# EAGLE board Sensorenschakeling_PCB_v2.3 (EAGLE 9.7.0)
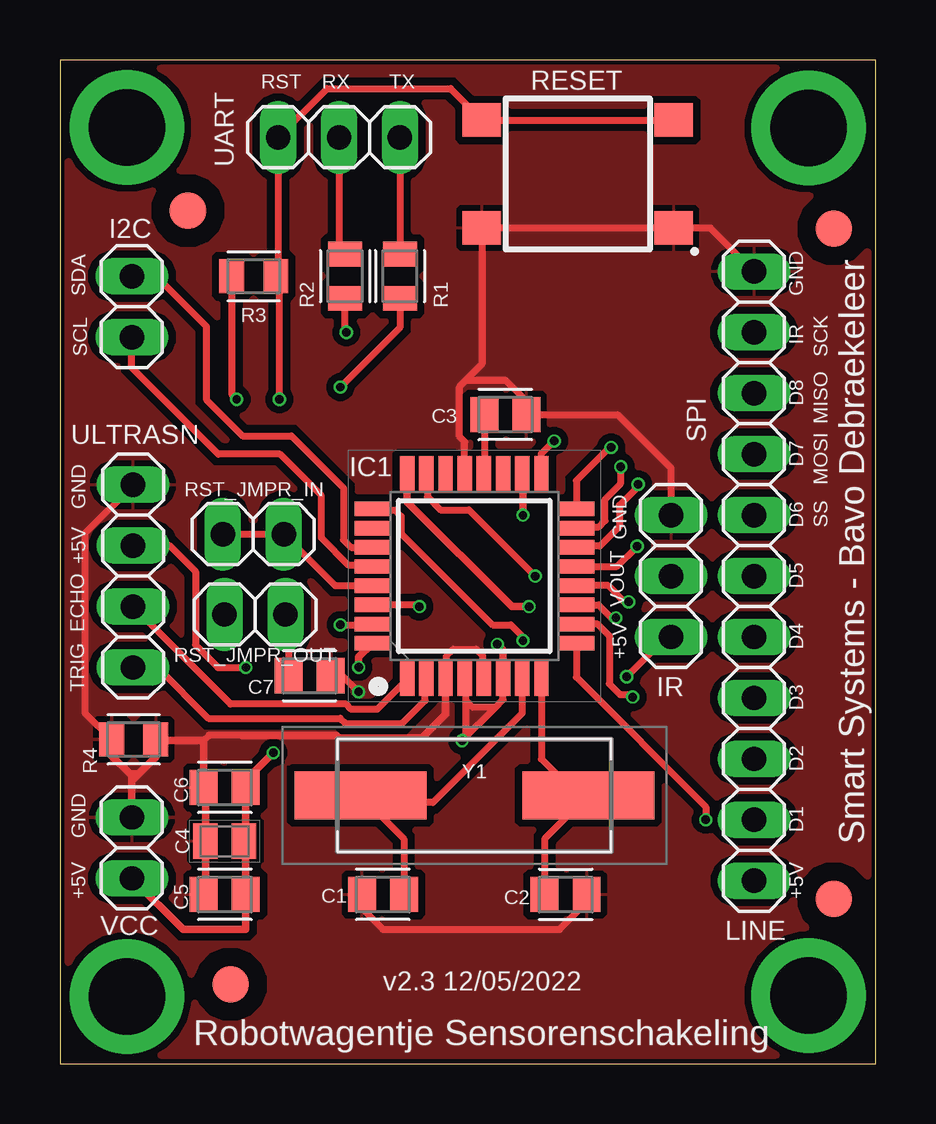
[diagram p0: board, top side]
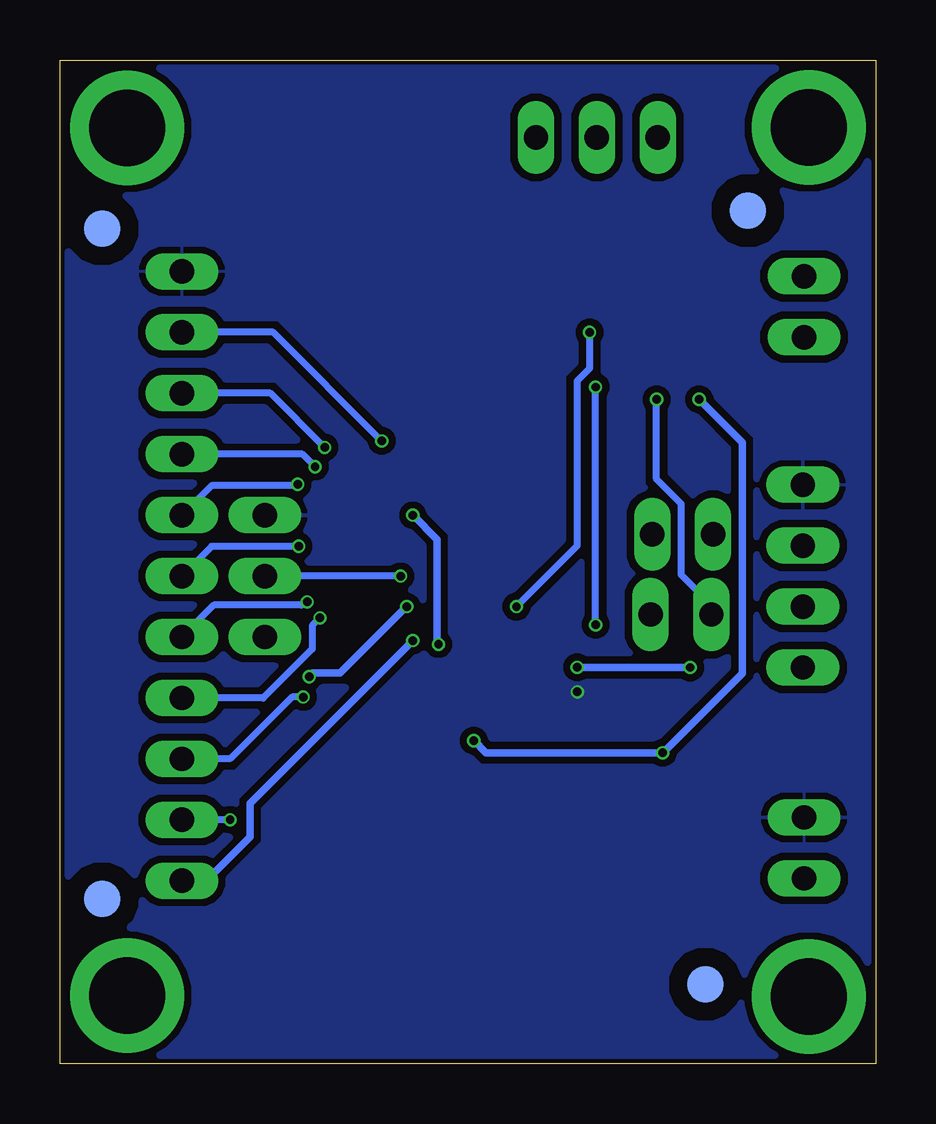
[diagram p1: board, bottom side, seen from below]

Size 34.02 x 41.83 mm. Coordinates in mm from the lower left corner, seen from the top.
Outline: 0,0 34.02,0 34.02,41.83 0,41.83 0,0
Copper layers (1*16): Top 0.035mm / dielectric 1.5mm / Bottom 0.035mm
Design rules "default *": minimum track width 0.3mm, minimum drill 0.35mm, track to track 0.3mm, track to pad 0.3mm, pad to pad 0.2mm, via to via 0.3mm, smd to smd 0.2mm, copper to edge 0.2mm, drill to drill 0.3mm, minimum pad ring 0.1mm, minimum via ring 0.1mm, stop-mask expansion 4mil, vias tented up to drill 0mil, thermal gap 10mil

## Footprints (pad centres in the part's own frame; a part is rotated, then mirrored left to right if it is on the bottom)
CAPC2012X110 = smd 1.165 x 1.465: 1 -0.875,0; 2 0.875,0
CAPC2012X145N = smd 1.02 x 1.47: 1 -0.8,0; 2 0.8,0
FID_060_P = smd 1.524 x 1.524 bottom: FIDB 0,0 | smd 1.524 x 1.524: FIDT 0,0
1X02 = drill 1.016 long: 1 -1.27,0; 2 1.27,0
QFP80P900X900X120-32N = smd 1.5 x 0.6: 1 -4.25,2.8; 2 -4.25,2; 3 -4.25,1.2; 4 -4.25,0.4; 5 -4.25,-0.4; 6 -4.25,-1.2; 7 -4.25,-2; 8 -4.25,-2.8; 17 4.25,-2.8; 18 4.25,-2; 19 4.25,-1.2; 20 4.25,-0.4; 21 4.25,0.4; 22 4.25,1.2; 23 4.25,2; 24 4.25,2.8 | smd 0.6 x 1.5: 9 -2.8,-4.25; 10 -2,-4.25; 11 -1.2,-4.25; 12 -0.4,-4.25; 13 0.4,-4.25; 14 1.2,-4.25; 15 2,-4.25; 16 2.8,-4.25; 25 2.8,4.25; 26 2,4.25; 27 1.2,4.25; 28 0.4,4.25; 29 -0.4,4.25; 30 -1.2,4.25; 31 -2,4.25; 32 -2.8,4.25
1X03 = drill 1.016 long: 1 -2.54,0; 2 0,0; 3 2.54,0
1X11 = drill 1.016 long: 1 -12.7,0; 2 -10.16,0; 3 -7.62,0; 4 -5.08,0; 5 -2.54,0; 6 0,0; 7 2.54,0; 8 5.08,0; 9 7.62,0; 10 10.16,0; 11 12.7,0
BEAGLEBONEBLACK_MOUNTING_HOLE = drill 3.175 pad 4.445: P$1 0,0
RESC2012X65 = smd 1.031 x 1.42: 1 -0.919,0; 2 0.919,0
B3FS-1000P = smd 1.6 x 1.4: 1 4,-2.25; 2 -4,-2.25; 3 4,2.25; 4 -4,2.25
1X04 = drill 1.016 long: 1 -3.81,0; 2 -1.27,0; 3 1.27,0; 4 3.81,0
HC49SM830506016ATF = smd 5.5 x 2: 1 -4.75,0; 2 4.75,0

## Placement (x,y rotation side)
C1  22pF  [CAPC2012X110]  13.46,7.05 0 top
C2  22pF  [CAPC2012X110]  21.08,7.05 180 top
C3  100nF  [CAPC2012X110]  18.57,27.05 0 top
C4  4.7uF_16V  [CAPC2012X145N]  6.87,9.27 0 top
C5  1uF  [CAPC2012X110]  6.87,7.05 0 top
C6  1uF  [CAPC2012X110]  6.87,11.51 0 top
C7  10uF  [CAPC2012X110]  10.41,16.17 180 top
FD1  FID_60MIL_P  [FID_060_P]  7.11,3.3 0 top
FD2  FID_60MIL_P  [FID_060_P]  32.26,34.8 0 top
FD3  FID_60MIL_P  [FID_060_P]  5.33,35.56 0 top
FD4  FID_60MIL_P  [FID_060_P]  32.26,6.86 0 top
I2C  [1X02]  3,31.55 270 top
IC1  ATMEGA328P-AN  [QFP80P900X900X120-32N]  17.27,20.32 90 top
IR  PINHD-1X3  [1X03]  25.48,20.32 90 top
LINE  PINHD-1X11  [1X11]  28.93,20.32 270 top
MGT1  BEAGLEBONEBLACK_MOUNTING_HOLE  [BEAGLEBONEBLACK_MOUNTING_HOLE]  2.79,2.79 0 top
MGT2  BEAGLEBONEBLACK_MOUNTING_HOLE  [BEAGLEBONEBLACK_MOUNTING_HOLE]  31.21,2.84 0 top
MGT3  BEAGLEBONEBLACK_MOUNTING_HOLE  [BEAGLEBONEBLACK_MOUNTING_HOLE]  2.79,39.02 0 top
MGT4  BEAGLEBONEBLACK_MOUNTING_HOLE  [BEAGLEBONEBLACK_MOUNTING_HOLE]  31.21,39 0 top
R1  1kΩ  [RESC2012X65]  14.17,32.82 90 top
R2  1kΩ  [RESC2012X65]  11.89,32.82 90 top
R3  1kΩ  [RESC2012X65]  8.08,32.82 180 top
R4  1kΩ  [RESC2012X65]  3.07,13.51 0 top
RESET  B3FS-1000P  [B3FS-1000P]  21.59,37.08 0 top
RST_JMPR_IN  [1X02]  8.06,22.07 0 top
RST_JMPR_OUT  [1X02]  8.13,18.72 0 top
UART  [1X03]  11.63,38.61 0 top
ULTRASN  PINHD-1X4  [1X04]  3.05,20.32 90 top
VCC  [1X02]  3,8.99 90 top
Y1  16MHz  [HC49SM830506016ATF]  17.27,11.18 180 top

## Library data of the parts
C1-C3 C5-C7 = Capacitor; CATEGORY: Capacitor
C4 = CC0805ZKY5V7BB475; ARROW_PART_NUMBER: CC0805ZKY5V7BB475; ARROW_PRICE-STOCK: https://www.arrow.com/en/products/cc0805zky5v7bb475/yageo; DESCRIPTION: YAGEO - CC0805ZKY5V7BB475 - SMD Multilayer Ceramic Capacitor, 4.7 F, 16 V, 0805 [2012 Metric], +80%, -20%, Y5V, CC Series; HEIGHT: 1.45mm; MANUFACTURER_NAME: KEMET; MANUFACTURER_PART_NUMBER: CC0805ZKY5V7BB475; MOUSER_PART_NUMBER: 603-CC805ZKY5V7BB475; MOUSER_PRICE-STOCK: https://www.mouser.co.uk/ProductDetail/Yageo/CC0805ZKY5V7BB475?qs=7s%252B3O6pAiyA4wtTM471wUA%3D%3D
FD1-FD4 = Fiducial
I2C RST_JMPR_IN RST_JMPR_OUT UART VCC = pinhead
IC1 = ATMEGA328P-AN; ARROW_PART_NUMBER: ATMEGA328P-AN; ARROW_PRICE-STOCK: https://www.arrow.com/en/products/atmega328p-an/microchip-technology?region=nac; DESCRIPTION: MCU 8-bit ATmega AVR RISC 32KB Flash Atmel ATMEGA328P-AN, 8bit AVR Microcontroller, 20MHz, 32 kB Flash, 32-Pin TQFP; HEIGHT: 1.2mm; MANUFACTURER_NAME: Microchip; MANUFACTURER_PART_NUMBER: ATMEGA328P-AN; MOUSER_PART_NUMBER: 556-ATMEGA328P-AN; MOUSER_PRICE-STOCK: https://www.mouser.co.uk/ProductDetail/Microchip-Technology-Atmel/ATMEGA328P-AN?qs=6Dg1WZIWLC6WK556tw8xAw%3D%3D
IR LINE ULTRASN = Connector; CATEGORY: CONNECTOR; SUB-CATEGORY: PIN-HEADER
MGT1-MGT4 = BeagleBone_Black_Wireless
R1-R4 = Resistor; CATEGORY: Resistor; SUB-CATEGORY: Fixed
RESET = B3FS-1000P; ARROW_PART_NUMBER: B3FS-1000P; ARROW_PRICE-STOCK: https://www.arrow.com/en/products/b3fs-1000p/omron?region=nac; DESCRIPTION: Switch Tact,6x6mm,flat act,gen purp,tape Plunger Tactile Switch, SPST-NO 0.05 A@ 24 V dc 0.5mm; HEIGHT: mm; MANUFACTURER_NAME: Omron Electronics; MANUFACTURER_PART_NUMBER: B3FS-1000P; MOUSER_PART_NUMBER: 653-B3FS-1000P; MOUSER_PRICE-STOCK: https://www.mouser.co.uk/ProductDetail/Omron-Electronics/B3FS-1000P?qs=ImaqFqjHA4k6odVF2%2FXWpQ%3D%3D
Y1 = HC49SM-8-30-50-60-16-ATF; DESCRIPTION: MULTICOMP - HC49SM-8-30-50-60-16-ATF - CRYSTAL, 8MHZ, 16PF, SMD; HEIGHT: 4mm; MANUFACTURER_NAME: MULTICOMP; MANUFACTURER_PART_NUMBER: HC49SM-8-30-50-60-16-ATF

## Nets
AREF: C3.1 IC1.20
D1: IC1.9 LINE.10
D2: IC1.10 LINE.9
D3: IC1.11 LINE.8
D4: IC1.12 LINE.7
D5: IC1.13 LINE.6
D6: IC1.14 LINE.5
D7: IC1.15 LINE.4
D8: IC1.16 LINE.3
ECHO: IC1.1 ULTRASN.2
GND: C1.1 C2.1 C3.2 C4.1 C5.1 C6.1 C7.1 IC1.3 IC1.5 IC1.21 IR.3 LINE.1 R4.1 R4.2 RESET.1 RESET.2 ULTRASN.4 VCC.2
IR: IC1.17 LINE.2
IR_ON/OFF: IC1.24 IR.1
LINE_ON/OFF: IC1.25 LINE.11
N$1: IC1.31 R1.1
N$2: IC1.30 R2.1
RST: IC1.29 RST_JMPR_IN.1 RST_JMPR_IN.2
RST_C: C7.2 RST_JMPR_OUT.2
RST_USB: R3.1 RESET.3 RESET.4 RST_JMPR_OUT.1 UART.1
RX: R2.2 UART.2
SCL: I2C.2 IC1.28
SDA: I2C.1 IC1.27
TOSC1: C1.2 IC1.7 Y1.2
TOSC2: C2.2 IC1.8 Y1.1
TRIG: IC1.2 ULTRASN.1
TX: R1.2 UART.3
ULTRASN_ON/OFF: IC1.32 ULTRASN.3
VCC: C4.2 C5.2 C6.2 IC1.4 IC1.6 IC1.18 R3.2 VCC.1
VOUT: IC1.23 IR.2

## Tracks (layer width: path | path; a pad name or v marks a point on that pad's centre or on a via)
AREF
  Top 0.3: C3.1 17.69,24.59 IC1.20
D1  (via drill 0.35)
  Top 0.3: IC1.9 21.52,16.11 26.92,10.7 v26.92,10.16
  Bottom 0.3: v26.92,10.16 LINE.10
D2  (via drill 0.35 pad 0.55)
  Top 0.3: v23.88,15.28 23.77,15.38 23.35,15.38 22.9,15.83 22.9,17.83 22.46,18.27 22.41,18.32 IC1.10
  Bottom 0.3: LINE.9 26.92,12.7 24.34,15.28 v23.88,15.28
D3  (via drill 0.35 pad 0.55)
  Top 0.3: v23.18,18.58 23,18.58 22.46,19.12 IC1.11
  Bottom 0.3: v23.18,18.58 23.5,18.25 23.5,17.28 25.54,15.24 LINE.8
D4  (via drill 0.35 pad 0.55)
  Top 0.3: v23.71,19.25 23.53,19.25 22.86,19.92 IC1.12
  Bottom 0.3: v23.71,19.25 23.82,19.25 23.96,19.11 27.61,19.11 LINE.7
D5  (via drill 0.35 pad 0.55)
  Top 0.3: IC1.13 23.22,20.72 v24.07,21.56
  Bottom 0.3: v24.07,21.56 27.69,21.56 LINE.6
D6  (via drill 0.35 pad 0.55)
  Top 0.3: IC1.14 21.57,21.57 22.51,21.57 23.32,22.39 23.32,23.27 23.98,23.93 23.98,24.02 v24.11,24.14
  Bottom 0.3: LINE.5 27.7,24.09 24.16,24.09 v24.11,24.14
D7  (via drill 0.35 pad 0.55)
  Top 0.3: v23.38,24.88 23.38,24.18 22.72,23.52 22.72,22.63 22.46,22.37 21.57,22.37 IC1.15
  Bottom 0.3: v23.38,24.88 23.9,25.4 LINE.4
D8  (via drill 0.35 pad 0.55)
  Top 0.3: v22.98,25.68 22.91,25.68 21.52,24.29 IC1.16
  Bottom 0.3: v22.98,25.68 25.24,27.94 LINE.3
ECHO
  Top 0.3: IC1.1 14.47,16.02 13.22,14.77 12.15,14.77 11.93,14.99 7.11,14.99 ULTRASN.2
GND  (via drill 0.35)
  Top 0.3: 28.77,32.85 LINE.1 27.12,34.83 RESET.1 RESET.2 17.59,29.15 16.92,28.49 | IR.3 25.48,24.82 23.24,27.05 C3.2 19.44,27.62 18.58,28.49 16.92,28.49 | ULTRASN.4 3.05,24.11 1.04,22.1 1.04,14.62 R4.1 | 16.92,28.49 16.66,28.22 16.66,26.13 16.87,25.92 IC1.21 | C1.1 12.59,6.46 13.46,5.59 20.83,5.59 21.96,6.72 C2.1 | IC1.3 16.12,16.12 16.12,17.01 16.39,17.27 17.36,17.27 17.62,17.01 17.62,16.12 IC1.5 | C7.1 11.77,16.17 v12.45,15.49 | 7.58,13.68 6.21,13.68 5.99,13.46
  Top 0.305: 3.99,12.78 3.28,12.07 | 3.28,12.07 3,11.79 | VCC.2 3,11.79 | IC1.3 16.07,14.55 15.09,13.57 11.65,13.57 11.54,13.68 7.58,13.68 | 3.99,12.78 R4.2 4.04,13.46 5.99,13.46 C6.1 6.07,11.43 C4.1 6.07,7.12 C5.1 | 3.99,12.78 3.99,12.77 | 2.21,13.46 R4.1 2.15,12.83 2.92,12.07 | 3,11.79 3,11.99 2.92,12.07 | 2.92,12.07 3.28,12.07 | 17.62,16.12 IC1.5
  pour Top: -0.25,42.16 -0.25,-1.27 34.8,-1.27 34.8,42.16
  pour Bottom: -0.51,42.16 -0.51,-1.27 34.8,-1.27 34.8,42.16
IR  (via drill 0.35 pad 0.55)
  Top 0.3: IC1.17 20.07,25.42 v20.6,25.95
  Bottom 0.3: v20.6,25.95 25.13,30.48 LINE.2
IR_ON/OFF  (via drill 0.35 pad 0.55)
  Top 0.3: v23.63,16.13 25.28,17.78 IR.1
  Top 0.305: IC1.24 14.47,23.41 18.84,19.05 v19.56,19.05
  Bottom 0.305: v23.63,16.13 23.48,16.27 22.34,16.27 v19.56,19.05
LINE_ON/OFF  (via drill 0.35 pad 0.55)
  Top 0.3: IC1.25 13.07,23.07 13.96,23.07 14.22,22.81 14.22,22.1 18.03,18.29 18.8,18.29 19.3,17.78 v19.3,17.63
  Bottom 0.305: LINE.11 27.92,7.62 26.09,9.45 26.09,10.85 v19.3,17.63
N$1  (via drill 0.35, 0.35 pad 0.55)
  Top 0.3: R1.1 14.17,30.68 v11.69,28.2 | IC1.31 12.99,18.29 v11.68,18.29
  Bottom 0.3: v11.68,18.29 v11.68,28.19 v11.69,28.2
N$2  (via drill 0.35, 0.35 pad 0.55)
  Top 0.3: v11.94,30.48 11.89,30.53 R2.1 | v14.99,19.05 14.92,19.12 IC1.30
  Bottom 0.3: v14.99,19.05 12.45,21.58 12.45,28.46 11.94,28.98 v11.94,30.48
RST
  Top 0.3: RST_JMPR_IN.1 RST_JMPR_IN.2 11.47,19.92 IC1.29
RST_C
  Top 0.3: RST_JMPR_OUT.2 9.53,18.58 C7.2
RST_USB  (via drill 0.35 pad 0.55)
  Top 0.3: 9.09,32.91 R3.1 9.09,32.72 | v9.14,27.69 9.14,32.67 9.09,32.72 | RESET.3 RESET.4 16.28,40.64 11.12,40.64 UART.1 9.09,32.72
  Bottom 0.3: v9.14,27.69 9.14,24.36 8.12,23.33 8.12,20.37 6.86,19.12 RST_JMPR_OUT.1
RX
  Top 0.3: UART.2 11.63,33.99 R2.2
SCL
  Top 0.3: I2C.2 3,29.01 6.6,25.4 9.17,25.4 10.9,23.68 10.9,21.91 12.04,20.77 12.97,20.77 IC1.28
SDA
  Top 0.3: I2C.1 4.01,32.82 6.1,30.73 6.1,27.69 7.62,26.16 9.65,26.16 11.82,23.99 11.82,21.83 12.14,21.52 IC1.27
TOSC1
  Top 0.3: IC1.7 19.27,14.61 15.54,10.88 12.81,10.88 Y1.2 14.34,9.36 C1.2
TOSC2
  Top 0.3: Y1.1 21.81,10.96 | 21.81,10.96 20.21,9.36 C2.2 | IC1.8 20.07,12.69 21.81,10.96
TRIG
  Top 0.3: ULTRASN.1 4.06,16.51 6.19,14.39 11.68,14.39 11.9,14.17 14.26,14.17 15.22,15.13 15.22,16.02 IC1.2
TX
  Top 0.3: UART.3 R1.2
ULTRASN_ON/OFF  (via drill 0.35, 0.35 pad 0.55)
  Top 0.3: 7.62,16.51 6.59,16.51 5.65,17.45 5.65,20.52 4.57,21.59 ULTRASN.3
  Top 0.305: 7.62,16.51 v7.74,16.51 | IC1.32 12.45,16.95 v12.45,16.52
  Bottom 0.305: v7.74,16.51 v12.45,16.51 v12.45,16.52
VCC  (via drill 0.35)
  Top 0.3: R3.2 7.16,27.89 v7.37,27.69 | IC1.4 16.92,16.02 16.92,15.13 | 16.92,15.13 17.19,14.87 18.17,14.87 | 18.17,14.87 18.47,15.17 IC1.6 | 18.17,14.87 v16.76,13.46 16.92,13.62 16.92,15.13
  Top 0.305: v19.3,22.86 19.3,24.54 IC1.18 | 7.75,9.2 C5.2 7.75,5.59 5.13,5.59 VCC.1 | 7.75,9.2 C4.2 | 7.75,9.2 C6.2 7.87,11.63 7.87,11.94 v8.89,12.95 | IC1.6 18.47,17.24 v18.23,17.47
  Bottom 0.305: v19.3,22.86 18.29,21.84 18.29,17.53 v18.23,17.47 | v16.76,13.46 16.26,12.95 v8.89,12.95 | v8.89,12.95 | v7.37,27.69 5.57,25.89 5.57,16.27 v8.89,12.95
  pour Top: 17.02,13.72 17.02,14.99 18.29,14.99
VOUT  (via drill 0.35 pad 0.55)
  Top 0.3: IC1.23 15.32,24.52 15.32,23.63 15.87,23.08 17.05,23.08 v19.81,20.32
  Bottom 0.3: v19.81,20.32 IR.2

## Text on the board
tNames: RST | RX | TX | SDA | GND | SCL | IR | SCK | D8 | MISO | SPI | D7 | MOSI | GND | D6 | SS | GND | +5V | D5 | VOUT | ECHO | +5V | D4 | TRIG | D3 | D2 | GND | D1 | Smart Systems - Bavo Debraekeleer | +5V | +5V | v2.3 12/05/2022 | Robotwagentje Sensorenschakeling